# Allegro board orp_ph.brd
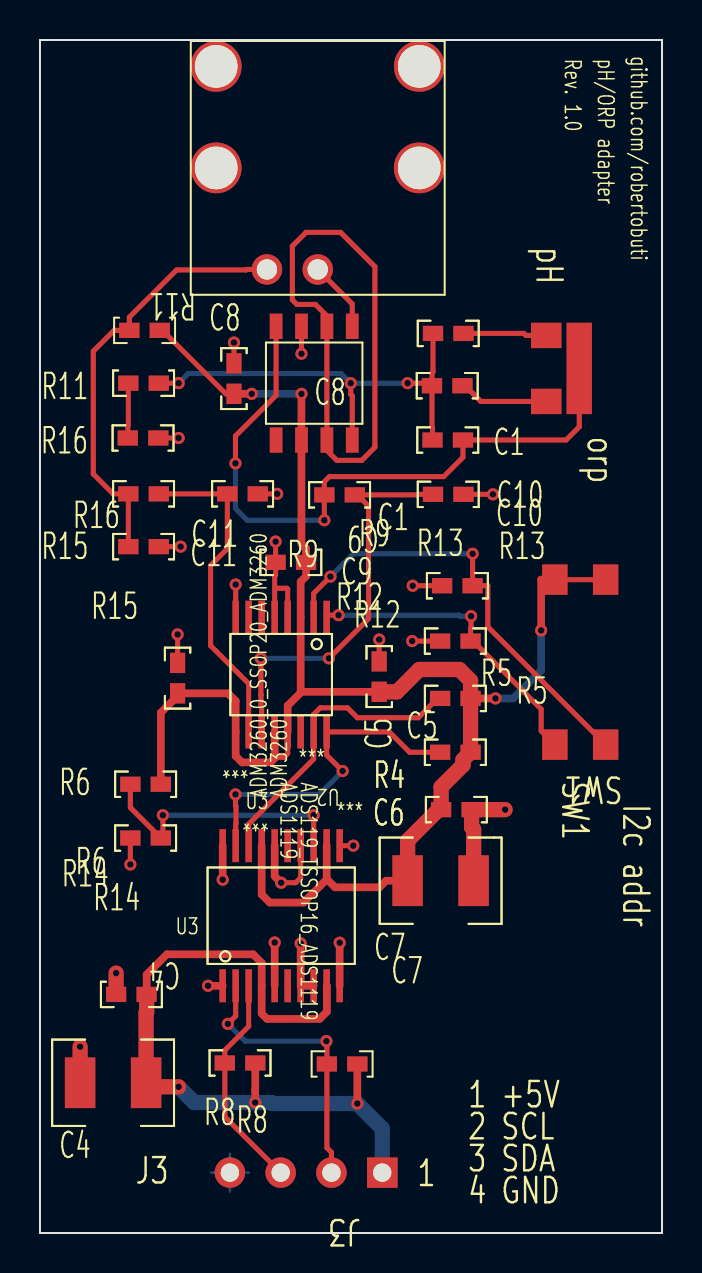
[diagram p0: board, top side]
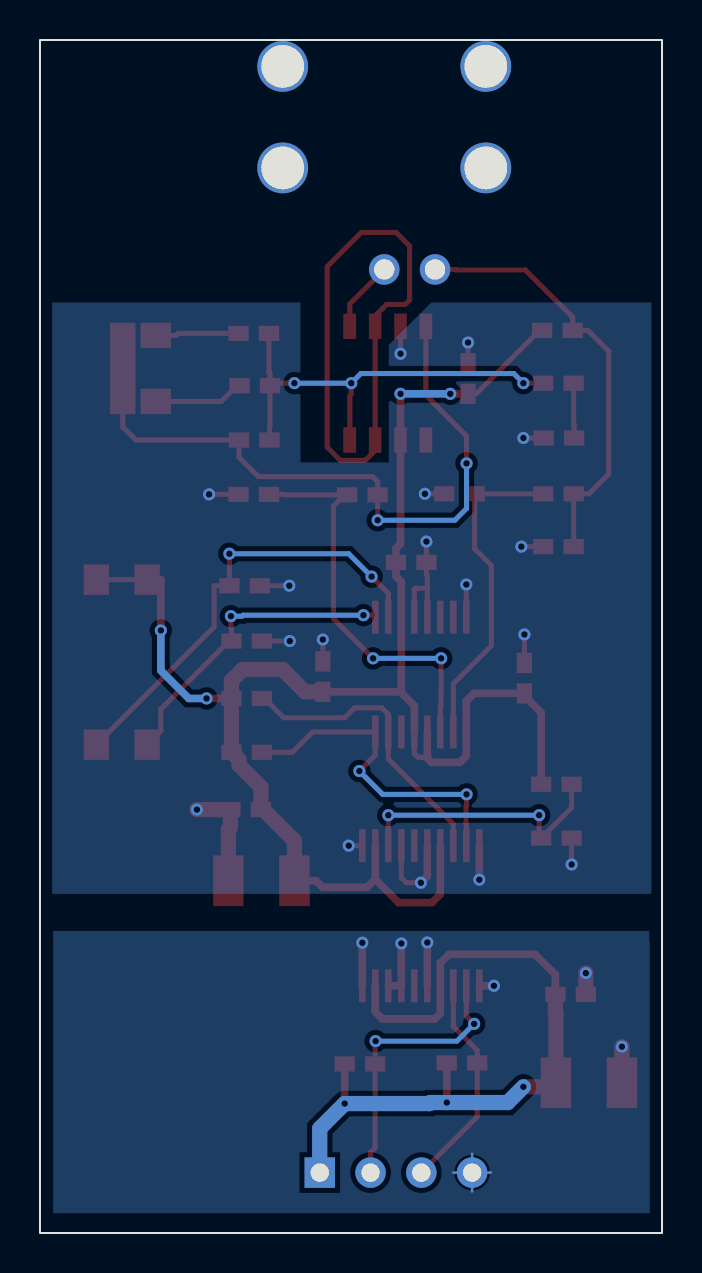
[diagram p1: board, bottom side, seen from below]

Outline 31.12 x 59.69 mm; copper layers: TOP, BOTTOM. Coordinates in mm from the lower left corner of the outline.
Outline path: rectangle 0,0 31.12,59.69 ; 0,59.69 31.12,59.69 31.12,0 0,0 0,59.69

## Placement (name value [footprint] x y rotation side)
C1  1nF  [0603RF_WV_12D]  20.4 39.67 0 top
C2  100nF  [0603RF_WV_12D]  6.88 27.76 90 top
C3  100nF  [0603RF_WV_12D]  4.57 11.94 180 top
C4  10uF  [1210]  3.66 7.52 180 top
C5  100nF  [0603RF_WV_12D]  16.97 27.84 90 top
C6  100nF  [0603RF_WV_12D]  20.83 21.18 0 top
C7  10uF  [1210]  20.04 17.63 0 top
C8  100nF  [0603RF_WV_12D]  9.7 42.75 90 top
C9  100nF  [0603RF_WV_12D]  12.55 33.55 180 top
C10  1uF  [0603RF_WV_12D]  20.42 36.96 0 top
C11  1uF  [0603RF_WV_12D]  10.13 36.98 0 top
J1  JUMPER 3SMT_NO  [JUMPER3_SMD]  27.99 43.26 0 top
J2  BNC  [BNC_90]  13.89 53.29 0 top
J3  HEADER 4  [JUMPER4]  14.58 3.02 270 top
R1  1M 1%  [0603RF_WV_12D]  20.42 45.01 0 top
R2  510K 1%  [0603RF_WV_12D]  20.37 42.39 0 top
R3  10K  [0603RF_WV_12D]  5.23 45.16 180 top
R4  10K  [0603RF_WV_12D]  20.78 24.05 0 top
R5  10K  [0603RF_WV_12D]  20.78 26.75 0 top
R6  30K  [0603RF_WV_12D]  5.28 22.45 0 top
R7  10K  [0603RF_WV_12D]  15.11 8.46 0 top
R8  10K  [0603RF_WV_12D]  10.01 8.51 0 top
R9  10K  [0603RF_WV_12D]  14.99 36.93 0 top
R10  10K  [0603RF_WV_12D]  5.18 36.98 0 top
R11  100K 1%  [0603RF_WV_12D]  5.18 42.52 180 top
R12  10K  [0603RF_WV_12D]  20.78 29.62 0 top
R13  10K  [0603RF_WV_12D]  20.88 32.38 0 top
R14  10K  [0603RF_WV_12D]  5.28 19.76 0 top
R15  10K  [0603RF_WV_12D]  5.18 34.34 0 top
R16  51K 1%  [0603RF_WV_12D]  5.16 39.78 0 top
SW1  SW DIP-2/SM  [SWDIP2_SMD]  27.03 28.88 270 top
U1  LMP7721  [SOIC8]  13.72 42.52 270 top
U2  ADS1119  [TSSOP16]  12.06 27.94 270 top
U3  ADM3260  [SSOP20]  12.06 15.88 90 top

## Library data of the parts
C1 = CAP_NP_1206
C2-C11 = C
J1 = JUMPER 3SMT_NO_0
J2 = BNC
J3 = HEADER 4
R1-R16 = RES_PTH_025
SW1 = SW DIP-2/SM
U1 = LMP7721_1
U2 = ADS119: Tolerance: ***; User Part Number: ***
U3 = ADM3260_0: Tolerance: ***; User Part Number: ***

## Footprints (pads in the part's own frame, mm; a bottom-side part is the same pattern mirrored in y, then rotated)
0603RF_WV_12D
  rect 1.016x0.762 smd: 1(-0.762,0) 2(0.762,0)
1210
  rect 1.524x2.54 smd: 1(-1.651,0) 2(1.651,0)
BNC_90
  round 2.54 hole 2.134: (-5.08,5.08) (-5.08,0) (5.08,5.08) (5.08,0)
  round 1.524 hole 1.016: 1(0,-5.08) 2(-2.54,-5.08)
JUMPER3_SMD
  rect 1.524x1.27 smd: 1(-2.667,1.651) 3(-2.667,-1.651)
  rect 1.27x4.572 smd: 2(-1.016,0)
JUMPER4
  rect 1.524x1.524 hole 0.914: 1(0,2.54)
  round 1.524 hole 0.914: 2(0,0) 3(0,-2.54) 4(0,-5.08)
SOIC8
  rect 1.27x0.635 smd: 1(-2.845,1.905) 2(-2.845,0.635) 3(-2.845,-0.635) 4(-2.845,-1.905) 5(2.845,-1.905) 6(2.845,-0.635) 7(2.845,0.635) 8(2.845,1.905)
SSOP20
  rect 1.651x0.33 smd: 1(-3.505,2.926) 2(-3.505,2.276) 3(-3.505,1.626) 4(-3.505,0.975) 5(-3.505,0.325) 6(-3.505,-0.325) 7(-3.505,-0.975) 8(-3.505,-1.626) 9(-3.505,-2.276) 10(-3.505,-2.926) 11(3.505,-2.926) 12(3.505,-2.276) 13(3.505,-1.626) 14(3.505,-0.975) 15(3.505,-0.325) 16(3.505,0.325) 17(3.505,0.975) 18(3.505,1.626) 19(3.505,2.276) 20(3.505,2.926)
SWDIP2_SMD
  rect 1.524x1.27 smd: 1(-3.81,1.27) 2(-3.81,-1.27) 3(4.445,-1.27) 4(4.445,1.27)
TSSOP16
  rect 1.651x0.33 smd: 1(-2.87,2.276) 2(-2.87,1.626) 3(-2.87,0.975) 4(-2.87,0.325) 5(-2.87,-0.325) 6(-2.87,-0.975) 7(-2.87,-1.626) 8(-2.87,-2.276) 9(2.87,-2.276) 10(2.87,-1.626) 11(2.87,-0.975) 12(2.87,-0.325) 13(2.87,0.325) 14(2.87,0.975) 15(2.87,1.626) 16(2.87,2.276)

## Nets
2V5: J2.2(SHIELD) R3.2 R10.1 R15.1
+5V: C2.1 C5.1 C6.1 C7.1 C8.1 C9.1 R3.1 R4.2 R5.2 R6.2 SW1.1(A1) SW1.2(A2) U1.6(V+) U2.3(R\E\S\E\T\) U2.9(REFP) U2.12(AVDD) U2.13(DVDD) U3.12(VISO) U3.17(VDDISO)
GND_SIGNAL: C2.2 C5.2 C6.2 C7.2 C8.2 C9.2 C10.2 C11.2 R12.1 R13.1 R14.1 R15.2 R16.2 U1.3(V-) U2.4(DGND) U2.5(AGND) U2.8(REFN) U3.11(GNDISO4) U3.14(GNDISO3) U3.16(GNDISO2) U3.20(GNDISO1)
SCL: J3.2 R7.1 U3.2(SCL2)
SCL_ISO: R4.1 U2.16(SCL) U3.19(SCL1)
SDA: J3.3 R8.1 U3.3(SDA2)
SDA_ISO: R5.1 U2.15(SDA) U3.18(SDA1)
N474738: J2.1(CENTER) U1.1(IN+)
N474867: U1.2(NC1) U1.7(NC2)
N474892: C1.1 R1.1 R2.1 R11.1 U1.8(IN-)
N474903: C1.2 J1.2 R9.1 U1.4(OUT)
N475451: C10.1 R9.2 U2.11(AIN0)
N475541: C11.1 R10.2 U2.10(AIN1)
N477843: J1.1 R1.2
N477847: J1.3 R2.2
N478129: R12.2 SW1.3(B2) U2.1(A0)
N478136: R13.2 SW1.4(B1) U2.2(A1)
N480159: R6.1 R14.2 U3.13(VSEL)
N480564: C3.1 C4.1 J3.1 R7.2 R8.2 U3.4(VDD) U3.9(VIN)
N480659: C3.2 C4.2 J3.4 U3.1(GNDP1) U3.5(GNDP3) U3.7(GNDP4) U3.8(PDIS) U3.10(GNDP2)
N4766401: R11.2 R16.1

Pads without a net: U1 5; U2 6 7 14; U3 6 15

## Via types
v1: diameter 0.61, hole 0.33, TOP to BOTTOM, 47 vias

## Routing (per net, layer and track width the routed paths; a pad name or vN(x,y) marks a point on that pad's centre or on a via; arc(x,y) is an arc through that point)
2V5: length 21.7
  TOP w0.254: R15.1 R10.1 3.66,36.98 2.67,37.97 2.67,44.12 3.71,45.16 R3.2 4.47,45.82 6.83,48.18 10.31,48.18 10.34,48.21 J2.2
+5V: length 86.6
  TOP w0.254: C8.1 9.3,41.99 6.12,45.16 R3.1 ; SW1.1 25.86,32.69 ; 11.8,23.82 11.82,23.8 12.2,23.8 12.39,23.99 U2.13
  TOP w0.381: v1(25.07,30.15) 25.07,32.69 SW1.2 25.86,32.69 ; 13.08,27.08 13.04,27.12 U2.3 13.04,32.59 13.31,32.85 C9.1 13.31,34.25 13.08,34.48 U1.6 v1(13.08,41.99) ; 13.08,27.08 12.39,26.39 U2.13 ; 13.08,27.08 C5.1 ; C8.1 v1(10.59,41.99) ; U3.17 11.09,16.94 11.5,16.54 13.18,16.54 14.34,17.69 14.34,17.71 ; R6.2 6.05,26.04 6.88,26.87 C2.1 9.41,27 9.79,26.62 U2.9 9.79,23.87 10.11,23.55 11.53,23.55 11.8,23.82 11.74,23.88 U2.12 ; C7.1 17.31,17.63 16.98,17.3 14.76,17.3 14.34,17.71 ; 14.34,17.71 U3.12 ; R5.2 v1(22.78,26.75)
  TOP w0.762: C5.1 17.86,27.08 18.97,28.19 20.98,28.19 21.54,27.64 R5.2 R4.2 21.16,23.67 21.16,23.41 20.07,22.32 C6.1 19.94,21.18 18.39,19.63 C7.1
  BOTTOM w0.381: v1(25.07,30.15) 25.07,28.14 23.67,26.75 v1(22.78,26.75) ; v1(10.59,41.99) v1(13.08,41.99)
GND_SIGNAL: length 33.5
  TOP w0.127: U1.3 13.08,45
  TOP w0.254: 11.74,32.26 11.74,32.87 11.79,32.92 C9.2 v1(11.79,34.59) ; 11.74,32.26 12.34,32.26 12.39,32.21 U2.4 ; 11.74,32.26 U2.5 ; C5.2 v1(16.97,29.69) ; R13.1 v1(18.64,32.38) ; R15.2 v1(7.04,34.34) ; C11.2 v1(11.86,36.98) ; U3.11 v1(15.67,19.38) ; C8.2 v1(9.7,44.55) ; R12.1 v1(18.62,29.62) ; R14.1 v1(4.52,18.44) ; U3.14 13.04,17.78 12.79,17.53 v1(12.06,17.53) ; C10.2 v1(22.66,36.96) ; U2.8 v1(9.79,32.45) ; 13.08,45 v1(13.08,43.99) ; R16.2 v1(6.93,39.78) ; C2.2 v1(6.88,29.95)
  TOP w0.381: U3.20 v1(9.14,17.68) ; U3.16 11.74,17.85 v1(12.06,17.53)
  TOP w0.762: v1(23.27,21.18) C6.2 21.59,20.29 21.69,20.19 C7.2
SCL: length 14
  TOP w0.254: v1(14.33,9.6) 14.35,9.58 R7.1 14.35,4.27 14.58,4.04 J3.2 ; v1(9.4,10.46) 9.79,10.86 U3.2
  BOTTOM w0.254: v1(14.33,9.6) 10.26,9.6 v1(9.4,10.46)
SCL_ISO: length 16.8
  TOP w0.254: v1(9.78,21.95) 9.78,21.39 9.8,21.36 9.8,20.47 9.79,20.46 U3.19 ; R4.1 18.49,24.05 17.48,25.07 U2.16 14.34,23.91 v1(15.14,23.11)
  BOTTOM w0.254: v1(9.78,21.95) 13.97,21.95 v1(15.14,23.11)
SDA: length 11
  TOP w0.254: J3.3 9.25,5.82 R8.1 9.25,9.14 10.44,10.34 U3.3
SDA_ISO: length 15
  TOP w0.254: U3.18 10.44,20.46 13.69,23.71 U2.15 13.69,25.95 14.02,26.28 15.38,26.28 15.88,25.78 18.92,25.78 19.89,26.75 R5.1
N474738: length 3.9
  TOP w0.254: 15.62,45 U1.1 15.62,46.48 J2.1
N474867: length 28.5
  TOP w0.254: 16.1,38.66 14.85,38.66 14.35,39.15 U1.7 U1.2 14.35,45.89 13.78,46.46 12.85,46.46 12.62,46.69 12.62,49.38 13.31,50.06 15.04,50.06 16.75,48.35 16.75,39.31 16.1,38.66
N474892: length 22.4
  TOP w0.254: 15.62,39.65 U1.8 15.62,41.88 15.54,41.96 v1(15.54,42.52) ; R2.1 19.61,43.03 19.66,43.08 R1.1 ; R2.1 19.48,42.52 v1(18.39,42.52) ; R2.1 19.61,40.34 19.63,40.31 C1.1 ; R11.1 v1(6.93,42.52)
  BOTTOM w0.254: v1(18.39,42.52) v1(15.54,42.52) 15.06,43 7.42,43 v1(6.93,42.52)
N474903: length 33.9
  TOP w0.127: U1.4 11.81,45
  TOP w0.254: 11.81,45 11.81,41.91 9.78,39.88 v1(9.78,38.51) ; J1.2 26.97,40.34 26.31,39.67 C1.2 21.16,38.81 20.19,37.85 14.48,37.85 14.22,37.59 R9.1 v1(14.22,35.66)
  BOTTOM w0.254: v1(9.78,38.51) 9.78,36.25 10.36,35.66 v1(14.22,35.66)
N475451: length 20.3
  TOP w0.254: 19.69,36.93 C10.1 18.9,36.96 18.87,36.93 15.88,36.93 ; v1(14.45,28.75) 16.44,30.74 16.44,36.37 15.88,36.93 ; 15.88,36.93 R9.2 ; v1(11.05,28.75) 11.05,26.93 11.05,26.92 11.05,26.36 11.09,26.32 U2.11
  BOTTOM w0.254: v1(14.45,28.75) v1(11.05,28.75)
N475541: length 16.5
  TOP w0.254: U2.10 10.44,27.48 8.53,29.39 8.53,33.4 9.37,34.24 C11.1 R10.2
N477843: length 4.2
  TOP w0.254: J1.1 24.31,44.91 24.21,45.01 R1.2
N477847: length 4.6
  TOP w0.254: R2.2 21.26,42.39 22.05,41.61 J1.3 25.45,41.61
N478129: length 15.5
  TOP w0.254: v1(21.56,30.86) 21.56,30.3 21.54,30.28 R12.2 21.67,29.62 25.07,26.21 25.07,25.12 SW1.3 ; U2.1 14.44,30.91 v1(14.94,30.91)
  BOTTOM w0.254: v1(14.94,30.91) 20.96,30.91 21.01,30.86 v1(21.56,30.86)
N478136: length 22.7
  TOP w0.254: U2.2 13.69,32 v1(14.53,32.84) ; v1(21.64,33.99) R13.2 22.4,32.38 22.4,30.33 SW1.4
  BOTTOM w0.254: v1(14.53,32.84) 15.67,33.99 v1(21.64,33.99)
N480159: length 13.6
  TOP w0.254: U3.13 v1(13.69,20.9) ; R6.1 4.52,21.29 R14.2 6.15,19.86 v1(6.15,20.9)
  BOTTOM w0.254: v1(13.69,20.9) v1(6.15,20.9)
N480564: length 38.1
  TOP w0.381: C3.1 5.33,12.93 6.35,13.94 10.66,13.94 11.09,13.51 U3.4 11.09,10.98 11.36,10.71 13.99,10.71 14.35,11.07 14.35,12.36 U3.9 ; R7.2 v1(15.88,6.48) ; v1(10.77,6.53) 10.77,7.15 10.77,7.15 R8.2
  TOP w0.762: C3.1 5.33,11.05 5.31,11.02 C4.1 5.51,7.32 v1(6.93,7.32)
  BOTTOM w0.762: v1(6.93,7.32) 7.72,6.53 v1(10.77,6.53) 11.58,6.53 11.63,6.48 v1(15.88,6.48) 17.12,5.23 J3.1
N480659: length 14.6
  TOP w0.381: U3.10 v1(14.99,14.52) ; U3.8 U3.7 v1(13.04,14.49) ; U3.1 v1(8.41,12.37) ; U3.5 v1(11.74,14.53)
  TOP w0.762: C4.2 v1(2.01,9.32) ; 3.68,11.94 C3.2 v1(3.81,13)
  BOTTOM w0.127: 9.5,2.08 J3.4 ; J3.4 8.56,3.02 ; J3.4 9.5,3.96 ; J3.4 10.44,3.02
N4766401: length 2.8
  TOP w0.254: R16.1 4.39,40.41 4.42,40.44 R11.2

## Copper pours and planes (outline as drawn; the poured copper is in the pictures)
GND_SIGNAL on BOTTOM: 0.53,46.56 11.53,46.56 13.67,44.42 13.67,38.56 18.08,38.56 18.08,46.56 30.51,46.56 30.51,16.97 0.53,16.97
N480659 on BOTTOM: 0.63,14.55 0.63,15.11 30.45,15.11 30.45,0.99 0.61,0.99 0.61,14.55

## Text on the board
Ref Des/Silkscreen Top: Rev. 1.0 | pH/ORP adapter | github.com/robertobuti | 1 | 1 +5V | 2 SCL | 3 SDA | 4 GND | pH | orp | I2c addr
